# Altium PCB PLC-无线通讯版-显示板-V3.PcbDoc
Units mm, origin at the board's own origin, x right, y up, seen from the top; angles counter-clockwise.
Board outline 112 x 42 mm, 2 copper layers (Top Layer, Bottom Layer), stack 1.271 mm thick; 33 components, 29 nets, 104 pads, 87 vias.
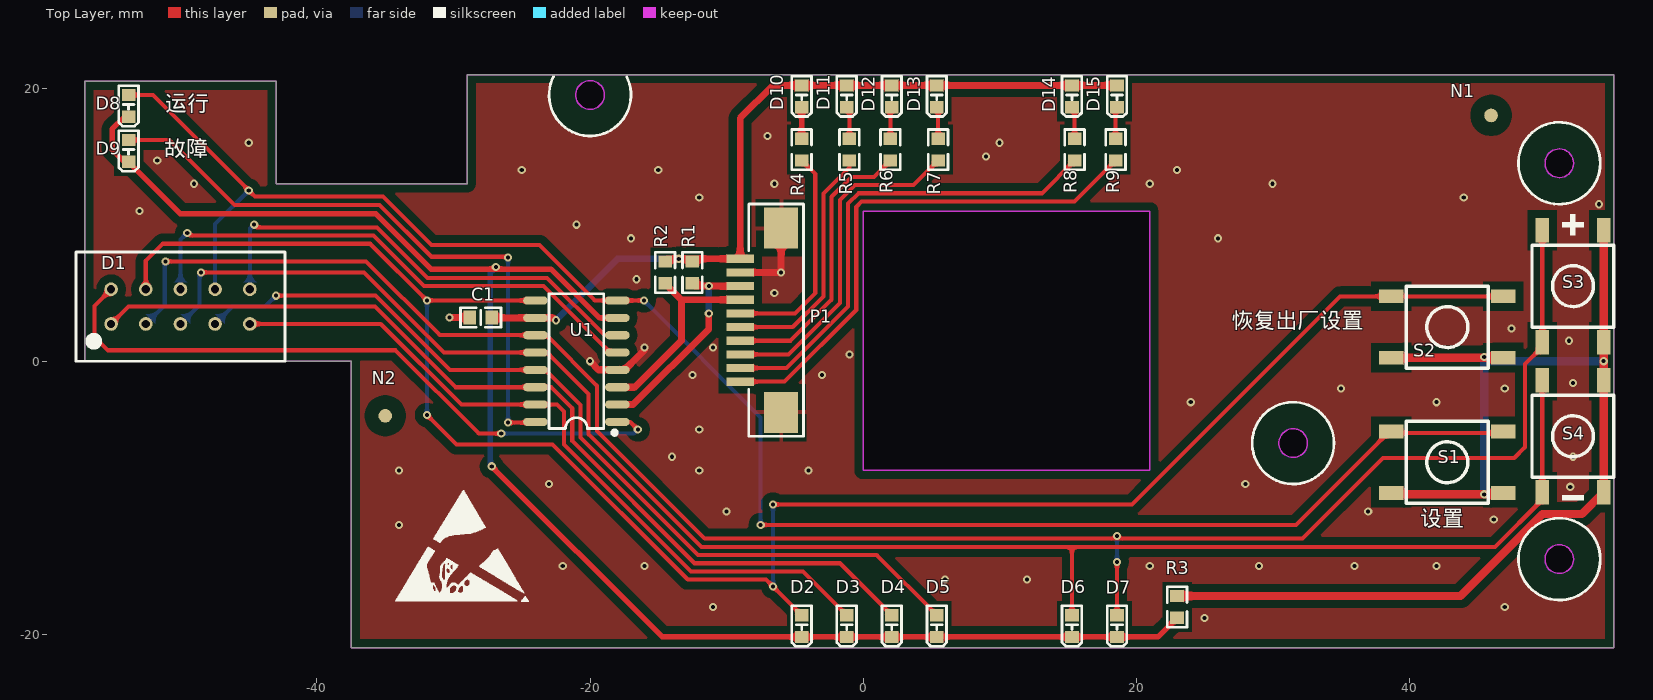
[diagram p0: Top Layer view]
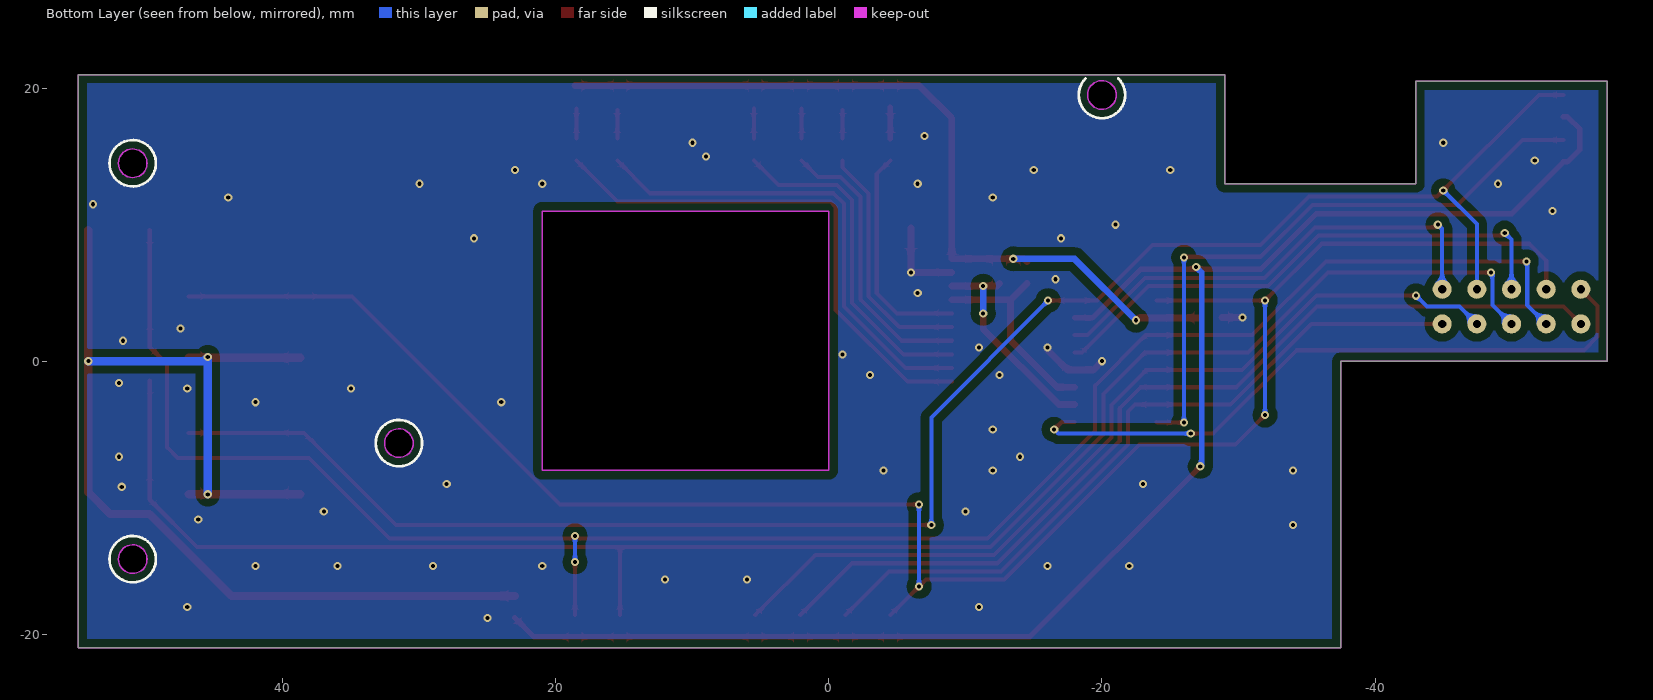
[diagram p1: Bottom Layer view, seen from below]
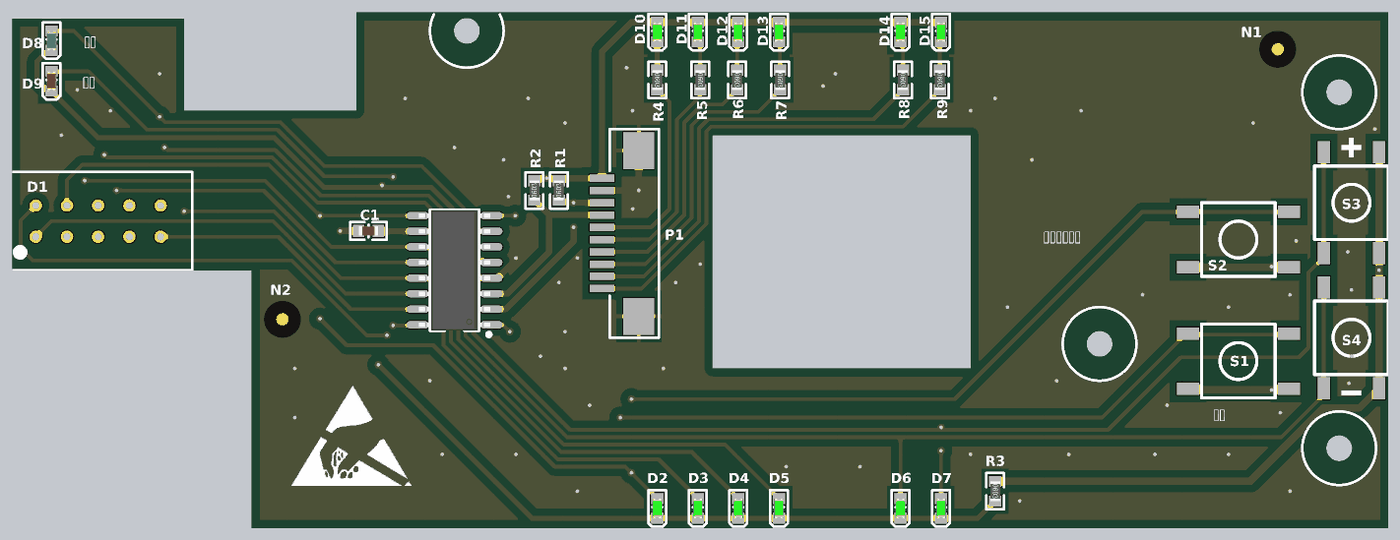
[diagram p2: 3D render of the assembled board from above, using the file's embedded part models]

## Layer stack, top to bottom
Top Solder: solder mask 0.0102, Solder Resist, Dk 3.5
Top Layer: signal copper 0.0356
Dielectric1: dielectric 1.2, FR-4, Dk 4.8
Bottom Layer: signal copper 0.0356
Bottom Solder: solder mask 0.0102, Solder Resist, Dk 3.5

## Board outline
-57,0 -57,20.5 -43,20.5 -43,13 -29,13 -29,21 55,21 55,-21 -37.5,-21 -37.5,0
cut-out: 0,-8 21,-8 21,11 0,11
cut-out: -20,20.55 ccw(c-20,19.5) -21.05,19.5 ccw(c-20,19.5) -20,18.45 ccw(c-20,19.5) -18.95,19.5 ccw(c-20,19.5)
cut-out: 51,15.55 ccw(c51,14.5) 49.95,14.5 ccw(c51,14.5) 51,13.45 ccw(c51,14.5) 52.05,14.5 ccw(c51,14.5)
cut-out: 31.5,-4.95 ccw(c31.5,-6) 30.45,-6 ccw(c31.5,-6) 31.5,-7.05 ccw(c31.5,-6) 32.55,-6 ccw(c31.5,-6)
cut-out: 51,-13.45 ccw(c51,-14.5) 49.95,-14.5 ccw(c51,-14.5) 51,-15.55 ccw(c51,-14.5) 52.05,-14.5 ccw(c51,-14.5)

## Design rules (kind name [scope] priority, off if disabled: settings)
Clearance Clearance敷铜间隔 [InPolygon] p1: gap=0.6
Clearance Clearance通用间隔 [All] p2: gap=0.3
PlaneConnect [All] p1: planeconnectstyle=Relief reliefexpansion=0.508 reliefentries=4 reliefconductorwidth=0.3 reliefairgap=0.3
PolygonConnect PolygonConnect_过孔 [All vs IsVia] p1: connectstyle=Direct reliefconductorwidth=0.254 reliefentries=4 polygonreliefangle="90 Angle" airgapwidth=0.254
PolygonConnect [All] p2: connectstyle=Relief reliefconductorwidth=0.3 reliefentries=4 polygonreliefangle="90 Angle" airgapwidth=0.6
RoutingVias [All] p1: holewidth=0.5 width=1 viastyle="Through Hole" minholewidth=0.4 minwidth=0.8 maxholewidth=10 maxwidth=10
SolderMaskExpansion [All] p1: expansion=0.102
Width [All] p1: maxlimit=10 minlimit=0.3 preferedwidth=0.5
29 further rules are at their usual default settings.

## Components (designator, comment, footprint, x,y, rotation, side; value= is the part's Value field where it differs from the comment)
C1 "105" C-0603 -28,3.2 r0 top
D1 "2351A，黄绿色，没小数点" 3位0.25英寸 -50,4 r0 top
D2 "DI1" LED-0603-GREEN -4.5,-19.4 r90 top
D3 "DI2" LED-0603-GREEN -1.2,-19.4 r90 top
D4 "DI3" LED-0603-GREEN 2.1,-19.4 r90 top
D5 "DI4" LED-0603-GREEN 5.4,-19.4 r90 top
D6 "DO1" LED-0603-GREEN 15.3,-19.4 r90 top
D7 "DO2" LED-0603-GREEN 18.6,-19.4 r90 top
D8 "运行" LED-0603-Blue -53.8,18.7 r90 top
D9 "错误" LED-0603-Red -53.8,15.4 r90 top
D10 "AI1" LED-0603-GREEN -4.5,19.4 r90 top
D11 "AI2" LED-0603-GREEN -1.2,19.4 r90 top
D12 "AI3" LED-0603-GREEN 2.1,19.4 r90 top
D13 "AI4" LED-0603-GREEN 5.4,19.4 r90 top
D14 "AO1" LED-0603-GREEN 15.3,19.4 r90 top
D15 "AO2" LED-0603-GREEN 18.6,19.4 r90 top
N1 "光学定位点" MARK-1mm-3mm 46,18 r0 top
N2 "光学定位点" MARK-1mm-3mm -35,-4 r0 top
P1 "" FPC-1.0mm下接翻盖_10P -7.5,3 r270 top
R1 "10K" R-0603 -12.5,6.5 r90 top
R2 "10K" R-0603 -14.5,6.5 r90 top
R3 "2K" R-0603 23,-18 r270 top
R4 "100" R-0603 -4.5,15.5 r270 top
R5 "100" R-0603 -1,15.5 r270 top
R6 "100" R-0603 2,15.5 r270 top
R7 "100" R-0603 5.5,15.5 r270 top
R8 "100" R-0603 15.5,15.5 r270 top
R9 "100" R-0603 18.5,15.5 r270 top
S1 "恢复出厂设置" SB-6*6*9.5_贴片 42.8,-7.4 r180 top
S2 "设置" SB-6*6*9.5_贴片 42.8,2.5 r180 top
S3 "加" SB-6*6*9.5_贴片 52,5.5 r270 top
S4 "减" SB-6*6*9.5_贴片 52,-5.5 r270 top
U1 "TM1650" SOP-16-M -21,0 r90 top

## Footprints (in the part's own frame and the unit in brackets; to place one, negate y for a bottom-side part, rotate by r counter-clockwise, add the part's x,y. Pads: shape width x height; smd on the part's side, far side on the other; paste and mask are expansions set on the pad)
3位0.25英寸 [mm]
  round 1 / inner round 1 / far side round 1.4 hole 0.6: 1(-5.08,-1.27) 2(-2.54,-1.27) 3(0,-1.27) 4(2.54,-1.27) 5(5.08,-1.27) 6(5.08,1.27) 7(2.54,1.27) 8(0,1.27) 9(-2.54,1.27) 10(-5.08,1.27)
  silkscreen extent -7.65,-4 7.65,4, body extent -7.65,-4 7.65,4, height 4
C-0603 [mm]
  rect 0.9x1 smd: 1(-0.8,0) 2(0.8,0)
  silkscreen extent -1.48,-0.72 1.48,0.72, body extent -0.8,-0.4 0.8,0.4, height 0.6
FPC-1.0mm下接翻盖_10P [mm]
  rect 0.6x2 smd: 1(-4.5,-1.5) 2(-3.5,-1.5) 3(-2.5,-1.5) 4(-1.5,-1.5) 5(-0.5,-1.5) 6(0.5,-1.5) 7(1.5,-1.5) 8(2.5,-1.5) 9(3.5,-1.5) 10(4.5,-1.5)
  rect 3x2.5 smd: 11(-6.75,1.5) 12(6.75,1.5)
  silkscreen extent -8.51,-0.86 8.49,3.13
LED-0603-Blue [mm]
  rect 0.9x1 smd: 1(0.8,0) 2(-0.8,0)
  silkscreen extent -1.48,-0.72 1.48,0.72, body extent -0.81,-0.4 0.81,0.4, height 0.6
LED-0603-GREEN [mm]
  rect 0.9x1 smd: 1(0.8,0) 2(-0.8,0)
  silkscreen extent -1.48,-0.72 1.48,0.72, body extent -0.81,-0.4 0.81,0.4, height 0.6
LED-0603-Red [mm]
  rect 0.9x1 smd: 1(0.8,0) 2(-0.8,0)
  silkscreen extent -1.48,-0.72 1.48,0.72, body extent -0.81,-0.4 0.81,0.4, height 0.6
MARK-1mm-3mm [mm]
  round 1 smd paste-0.6 mask+1: 1(0,0)
  Top Layer pour cut-out: -1.5,0 -1.386,-0.574 -1.061,-1.061 -0.574,-1.386 0,-1.5 0,-1.5 0.574,-1.386 1.061,-1.061 1.386,-0.574 1.5,0 1.5,0 1.386,0.574 1.061,1.061 0.574,1.386 0,1.5 0,1.5 -0.574,1.386 -1.061,1.061 -1.386,0.574 -1.5,0
R-0603 [mm]
  rect 0.9x1 smd: 1(-0.8,0) 2(0.8,0)
  silkscreen extent -1.48,-0.72 1.48,0.72, body extent -0.8,-0.4 0.8,0.4, height 0.45
SB-6*6*9.5_贴片 [mm]
  rect 1.8x1 smd: 1(-4.1,2.25) 1(4.1,2.25) 2(-4.1,-2.25) 2(4.1,-2.25)
  silkscreen extent -3,-3 3,3, body extent -3,-3 3,3, height 9.5
SOP-16-M [mm]
  oval 0.6x1.8 smd: 1(-4.445,-3) 2(-3.175,-3) 3(-1.905,-3) 4(-0.635,-3) 5(0.635,-3) 6(1.905,-3) 7(3.175,-3) 8(4.445,-3) 9(4.445,3) 10(3.175,3) 11(1.905,3) 12(0.635,3) 13(-0.635,3) 14(-1.905,3) 15(-3.175,3) 16(-4.445,3)
  silkscreen extent -5.38,-2.95 4.93,2, body extent -4.9,-2.9 4.9,2.9, height 1.75

## Part data
C1: library part Cap, "Capacitor"
D1: library part 3位数码管-无点-2351A
D2 D3 D4 D5 D6 D7 D8 D9 D10 D11 D12 D13 D14 D15: library part LED-0603-Blue
N1 N2: library part 无引脚
P1: library part "Header 12", "Header, 12-Pin"
R1 R2 R3 R4 R5 R6 R7 R8 R9: library part Res2-0603, "0603"
S1 S2 S3 S4: library part SB-6*6*9, "SB-6*6*10"
U1: "共阴数码管驱动器"

## Via types
v1: diameter 0.6, hole 0.3, Top Layer to Bottom Layer, tented both sides, 87 vias

## Nets (pads, with @x,y where several pads share a name; then routed paths per layer and width w, separated by ;. In a path a pad name is that pad's centre, name@x,y a point inside that pad or via, vN(x,y) a via of type N, cw(c..) or ccw(c..) an arc to the next point about the centre after c; other vN are vias at no path point)
3.3V: C1.2 D10.1 D11.1 D12.1 D13.1 D14.1 D15.1 P1.1 R1.2 R2.2 U1.10 | length 60.1
  Top Layer w0.5: C1.2@-27.175,3.175 U1.10 -22.675,3.175 v1(-22.5,3) ; R2.2 -14.3,7.5 P1.1 -9,17.8 -6.6,20.2 D10.1 D11.1 D12.1 D13.1 D14.1 D15.1
  Bottom Layer w0.5: v1(-22.5,3) -18,7.5 v1(-13.5,7.5)
A: D1.7 D8.1 S1.2 U1.8 | length 129.4
  Top Layer w0.3: D8.1 -52,19.5 -44.55,12.05 -35.166,12.05 -31.616,8.5 -23.707,8.5 -19.652,4.445 U1.8 v1(-16.055,4.445) ; v1(-7.5,-12) 31.7,-12 38.45,-5.25 S1.2@46.9,-5.25
  Bottom Layer w0.3: D1.7 -47.46,10.04 v1(-45,12.5) ; v1(-16.055,4.445) -7.5,-4.11 v1(-7.5,-12)
B: D1.9 D2.1 S2.2 U1.9 | length 140.6
  Top Layer w0.3: D1.9 -52.54,7.36 -51.3,8.6 -36.1,8.6 v1(-31.945,4.445) U1.9 ; v1(-31.945,-3.945) -29.79,-6.1 -22.743,-6.1 -12.843,-16 -7.1,-16 D2.1 ; v1(-6.6,-10.5) 19.7,-10.5 34.95,4.75 38.7,4.75 S2.2@46.9,4.75
  Bottom Layer w0.3: D1.9 D1.9@-52.5,5.27 ; v1(-31.945,-3.945) v1(-31.945,4.445) ; v1(-6.6,-16.5) v1(-6.6,-10.5)
C: D1.2 D7.1 S3.2 U1.11 | length 140.1
  Top Layer w0.3: v1(-51.1,7.3) -36.4,7.3 -31.005,1.905 U1.11 -23.205,1.905 -19.5,-1.8 -19.5,-5.1 -11.6,-13 32.2,-13 38.1,-7.1 47.7,-7.1 48.5,-6.3 48.5,-0.2 49.75,1.05 49.75,1.4 S3.2@49.75,9.6 ; D7.1 v1(18.6,-14.7)
  Bottom Layer w0.3: D1.2 -51.15,4.12 -51.15,7.25 v1(-51.1,7.3) ; v1(18.6,-14.7) v1(18.6,-12.8)
D: D1.3 D6.1 S4.2 U1.12 | length 127.9
  Top Layer w0.3: v1(-48.5,6.5) -36.554,6.5 -30.689,0.635 U1.12 -23.135,0.635 -20.1,-2.4 -20.1,-5.349 -11.849,-13.6 46.3,-13.6 49.75,-10.15 49.75,-9.6 S4.2@49.75,-1.4 ; D6.1 15.3,-13.6
  Bottom Layer w0.3: D1.3 -48.61,4.12 -48.61,6.39 v1(-48.5,6.5)
DIG1: D1.10 U1.1 | length 48.6
  Top Layer w0.3: D1.10 -56.3,4.05 -56.3,1.8 -55.3,0.8 -34.249,0.8 -28.149,-5.3 v1(-26.5,-5.3) ; U1.1 -17.055,-4.445 v1(-16.5,-5)
  Bottom Layer w0.3: v1(-26.5,-5.3) -16.8,-5.3 v1(-16.5,-5)
DIG2: D1.8 U1.5 | length 39.5
  Top Layer w0.3: v1(-49.5,9.4) -49.3,9.2 -35.851,9.2 -32.151,5.5 -23.394,5.5 -18.529,0.635 U1.5
  Bottom Layer w0.3: D1.8 -50,8.9 v1(-49.5,9.4)
DIG3: D1.6 U1.6 | length 34.8
  Top Layer w0.3: v1(-44.6,10) -44.4,9.8 -35.603,9.8 -31.903,6.1 -23.146,6.1 -18.951,1.905 U1.6
  Bottom Layer w0.3: D1.6 -44.92,9.68 v1(-44.6,10)
DIG4: D2.2 D3.2 D4.2 D5.2 D6.2 D7.2 D8.2 D9.2 R3.2 U1.7 | length 115.9
  Top Layer w0.4: D8.2 -54.1,17.9 -55,17 -55,15.5 -54.1,14.6 D9.2 -50,10.8 -35.684,10.8 -31.634,6.75 -22.877,6.75 -19.302,3.175 U1.7 ; v1(-27.2,-7.7) -14.7,-20.2 D2.2 D3.2 D4.2 D5.2 D6.2 D7.2 21.6,-20.2 R3.2
  Bottom Layer w0.4: v1(-27.2,-7.7) -27.3,-7.6 -27.3,6.5 v1(-26.9,6.9)
DP: D9.1 U1.16 | length 45.5
  Top Layer w0.3: D9.1 -50.8,16.2 -46.05,11.45 -35.414,11.45 -31.614,7.65 -26.05,7.65 v1(-26,7.6) ; v1(-26,-4.5) -24.055,-4.5 U1.16
  Bottom Layer w0.3: v1(-26,-4.5) v1(-26,7.6)
E: D1.4 D5.1 U1.13 | length 64.8
  Top Layer w0.3: v1(-43,4.8) -35.703,4.8 -30.268,-0.635 U1.13 -23.265,-0.635 -20.7,-3.2 -20.7,-5.597 -12.097,-14.2 1,-14.2 D5.1
  Bottom Layer w0.3: D1.4 -46.19,4 -43.8,4 v1(-43,4.8)
F: D1.1 D4.1 U1.14 | length 68.5
  Top Layer w0.3: D1.1 -53.81,4 -35.751,4 -29.846,-1.905 U1.14 -22.844,-1.905 -21.3,-3.449 -21.3,-5.846 -12.346,-14.8 -1.7,-14.8 D4.1
G: D1.5 D3.1 U1.15 | length 54
  Top Layer w0.3: D1.5 -35.33,2.73 -29.425,-3.175 U1.15 -22.422,-3.175 -21.9,-3.697 -21.9,-6.094 -12.594,-15.4 -4.4,-15.4 D3.1
GND: C1.1 P1.2 P1.11 P1.12 U1.4 | length 12.7
  Top Layer w0.5: v1(-30.3,3.2) C1.1 ; v1(-20,0) -19.365,-0.635 U1.4 -17.468,-0.635 -16,0.833 v1(-16,1) ; P1.2 -6.2,6.5 -6,6.7 P1.11
  other v1: 25,-18.8 -11,-18 47,-18 6,-16 12,-16 -22,-15 -16,-15 21,-15 29,-15 36,-15 42,-15 -34,-12 46.2,-11.6 -10,-11 37,-11 51.8,-9.2 -23,-9 28,-9 -34,-8 -12,-8 -4,-8 -14,-7 52,-7 -12,-5 24,-3 42,-3 35,-2 47,-2 52,-1.6 -12.5,-1 -3,-1 -1,0.5 -11,1 51.7,1.5 47.5,2.4 -6.5,5 -16.6,6 -6,6.5 -17,9 26,9 -21,10 -53,11 53.9,11.5 -12,12 44,12 -49,13 -6.5,13 21,13 30,13 -25,14 -15,14 23,14 -51.7,14.7 9,15 -45,16 10,16 -7,16.5
LED-AI1: P1.5 R4.2 | length 16.2
  Top Layer w0.3: P1.5 -5,3.5 -3.5,5 -3.5,13.7 R4.2
LED-AI2: P1.6 R5.2 | length 17.8
  Top Layer w0.3: P1.6 -5.151,2.5 -2.9,4.751 -2.9,12.294 -1,14.194 R5.2
LED-AI3: P1.7 R6.2 | length 20.9
  Top Layer w0.3: P1.7 -5.303,1.5 -2.3,4.503 -2.3,12.046 -0.846,13.5 0.8,13.5 R6.2
LED-AI4: P1.8 R7.2 | length 24.8
  Top Layer w0.3: P1.8 -5.454,0.5 -1.7,4.254 -1.7,11.797 -0.597,12.9 3.7,12.9 R7.2
LED-AO1: P1.9 R8.2 | length 35.2
  Top Layer w0.3: P1.9 -5.606,-0.5 -1.1,4.006 -1.1,11.549 -0.349,12.3 13.1,12.3 R8.2
LED-AO2: P1.10 R9.2 | length 38.6
  Top Layer w0.3: P1.10 -5.757,-1.5 -0.5,3.757 -0.5,11.3 -0.1,11.7 15.5,11.7 R9.2
NetD10_2: D10.2 R4.1 | length 2.3
  Top Layer w0.4: R4.1 D10.2
NetD11_2: D11.2 R5.1 | length 2.1
  Top Layer w0.3: R5.1 D11.2@-1,18.4
NetD12_2: D12.2 R6.1 | length 2.2
  Top Layer w0.3: R6.1 D12.2@2,18.5
NetD13_2: D13.2 R7.1 | length 2.2
  Top Layer w0.3: R7.1 D13.2@5.5,18.5
NetD14_2: D14.2 R8.1 | length 2.1
  Top Layer w0.3: R8.1 D14.2@15.5,18.4
NetD15_2: D15.2 R9.1 | length 2.2
  Top Layer w0.3: R9.1 D15.2@18.5,18.5
NetR3_1: R3.1 S1.1 S2.1 S3.1 S4.1 | length 88.9
  Top Layer w0.6: R3.1 43.761,-17.2 49.761,-11.2 52.65,-11.2 54.25,-9.6 54.25,-1.4 v1(54.25,0) 54.25,1.4 S3.1@54.25,9.6 ; S1.1@38.7,-9.75 v1(45.5,-9.75) S1.1@46.9,-9.75 ; S2.1@38.7,0.25 S2.1@46.9,0.25
  Bottom Layer w0.6: v1(45.5,-9.75) v1(45.5,0.3) 45.8,0 v1(54.25,0)
SCL: P1.3 R1.1 U1.2 | length 15.7
  Top Layer w0.5: U1.2 -16.844,-3.175 -11.3,2.369 v1(-11.3,3.5) ; R1.1 -12.3,5.5 P1.3
  Bottom Layer w0.5: v1(-11.3,3.5) v1(-11.3,5.5)
SDA: P1.4 R2.1 U1.3 | length 15.1
  Top Layer w0.5: U1.3 -16.705,-1.905 -13.3,1.5 -13.3,4.5 ; R2.1 -13.3,4.5 ; P1.4 -13.3,4.5
pads on no net: N1.1 N2.1

## Polygon pours and split planes (outlines as drawn)
GND on Top Layer "Bottom Layer-No Net" (solid, remove dead copper, pour order 8): -57,20.5 -43,20.5 -43,13 -29,13 -29,21 55,21 55,-21 -37.5,-21 -37.5,0 -57,0
GND on Bottom Layer "Bottom Layer-No Net" (solid, remove dead copper, pour order 10): -57,20.5 -43,20.5 -43,13 -29,13 -29,21 55,21 55,-21 -37.5,-21 -37.5,0 -57,0

## Keep-outs
Keep-Out Layer:
  circle w0.1: c-20,19.5 r1.05
  circle w0.1: c51,14.5 r1.05
  circle w0.1: c31.5,-6 r1.05
  circle w0.1: c51,-14.5 r1.05
  lines w0.1: -57,0 -57,20.5 -43,20.5 -43,13 -29,13 -29,21 55,21 55,-21 -37.5,-21 -37.5,0 -57,0 ; 0,-8 21,-8 21,11 0,11 0,-8

## Other copper
Top Layer:
  pour cut-out: -23,19.5 ccw(c-20,19.5) -20,16.5 ccw(c-20,19.5) -17,19.5 ccw(c-20,19.5) -20,22.5 ccw(c-20,19.5)
  pour cut-out: -21.7,19.5 ccw(c-20,19.5) -20,17.8 ccw(c-20,19.5) -18.3,19.5 ccw(c-20,19.5) -20,21.2 ccw(c-20,19.5)
  pour cut-out: 48,14.5 ccw(c51,14.5) 51,11.5 ccw(c51,14.5) 54,14.5 ccw(c51,14.5) 51,17.5 ccw(c51,14.5)
  pour cut-out: 49.3,14.5 ccw(c51,14.5) 51,12.8 ccw(c51,14.5) 52.7,14.5 ccw(c51,14.5) 51,16.2 ccw(c51,14.5)
  pour cut-out: 28.5,-6 ccw(c31.5,-6) 31.5,-9 ccw(c31.5,-6) 34.5,-6 ccw(c31.5,-6) 31.5,-3 ccw(c31.5,-6)
  pour cut-out: 29.8,-6 ccw(c31.5,-6) 31.5,-7.7 ccw(c31.5,-6) 33.2,-6 ccw(c31.5,-6) 31.5,-4.3 ccw(c31.5,-6)
  pour cut-out: 49.3,-14.5 ccw(c51,-14.5) 51,-16.2 ccw(c51,-14.5) 52.7,-14.5 ccw(c51,-14.5) 51,-12.8 ccw(c51,-14.5)
  pour cut-out: 48,-14.5 ccw(c51,-14.5) 51,-17.5 ccw(c51,-14.5) 54,-14.5 ccw(c51,-14.5) 51,-11.5 ccw(c51,-14.5)

## Silkscreen, mask and mechanical layers (free items; w line width, h text height)
Top Overlay:
  drawing of 781 lines, arcs and shapes, not listed
  text "运行" at -51.1,17.9 h2
  text "故障" at -51.2,14.6 h2
  text "恢复出厂设置" at 27,2 h2
  text "设置" at 40.8,-12.5 h2
Bottom Overlay:
  circle w0.2: c51,14.5 r1.7
  circle w0.2: c31.5,-6 r1.7
  circle w0.2: c51,-14.5 r1.7
  lines w0.2: -21.202,20.702 ccw(c-20,19.5) -18.798,20.702
Mechanical 9:
  lines w0.1: -39,-19.4 37.5,-19.4 ; -39,19.4 37.5,19.4 ; -33.5,-21.5 -33.5,-18 ; -33.5,18 -33.5,21.5 ; -30.2,-21.5 -30.2,-18 ; -30.2,18 -30.2,21.5 ; -26.9,-21.5 -26.9,-18 ; -26.9,18 -26.9,21.5 ; -23.6,-21.5 -23.6,-18 ; -20.3,-21.5 -20.3,-18 ; -17,-21.5 -17,-18 ; -13.7,-21.5 -13.7,-18 ; -10.4,-21.5 -10.4,-18 ; -10.4,18 -10.4,21.5 ; -5,-20.4 -5,-17.4 ; -4.5,17.4 -4.5,20.4 ; -1.7,-21.5 -1.7,-18 ; -1.7,18 -1.7,21.5 ; 1.6,-21.5 1.6,-18 ; 1.6,18 1.6,21.5 ; 4.9,-21.5 4.9,-18 ; 4.9,18 4.9,21.5 ; 8.2,-21.5 8.2,-18 ; 8.2,18 8.2,21.5 ; 11.5,-21.5 11.5,-18 ; 11.5,18 11.5,21.5 ; 14.8,-21.5 14.8,-18 ; 14.8,18 14.8,21.5 ; 18.1,-21.5 18.1,-18 ; 18.1,18 18.1,21.5
Mechanical 14:
  lines w0.1: -60,0 60,0 ; -53.8,10 -53.8,42.3 ; -39,-26.5 57.5,-26.5 ; -39,26.5 57.5,26.5 ; 0,-40 0,40 ; -58.5,-0.5 -41.5,-0.5 ; -58.5,-0.5 -58.5,8.4 ; -58.5,-0.5 -41.5,8.4 ; -58.5,8.4 -41.5,8.4 ; -58.5,8.4 -41.5,-0.5 ; -41.5,-0.5 -41.5,8.4
Mechanical 15:
  lines w0.1: -73.5,-24 69,-24 ; -60,-0.5 -39,-0.5 -39,-40 ; -54.7,22 -52.3,22 ; -53.8,15.4 -52.4,15.4 ; -53.8,18.7 -52.3,18.7 ; -50.5,-31.5 -50.5,31.5 ; -41.2,40 -41.2,24 -39,24 -39,40 ; -14.2,-41.4 -14.2,-28.4 ; -11,3 53.5,3 ; 32.7,-41.4 32.7,-28.4 ; 39,-7.5 46,-7.5 ; 42.8,-13 42.8,18 ; 50.5,-31.5 50.5,31.5 ; -60,-40 -60,40 59.5,40 59.5,-40 -60,-40 ; -54.6,14.6 -54.6,16.2 -53,16.2 -53,14.6 -54.6,14.6 ; -54.6,17.9 -54.6,19.5 -53,19.5 -53,17.9 -54.6,17.9 ; -54.6,21.2 -54.6,22.8 -53,22.8 -53,21.2 -54.6,21.2 ; 47.2,-11 56.65,-11 56.65,11 47.2,11 47.2,-11
  lines w0.2: -43.5,-117.5 44.5,-117.5 ; -43.5,-111.5 44.5,-111.5 ; -43.5,-105.5 44.5,-105.5 ; -43.5,-99.5 44.5,-99.5 ; -43.5,-93.5 44.5,-93.5 ; -43.5,-87.5 44.5,-87.5 ; -43.5,-81.5 44.5,-81.5 ; -21.5,-123.5 -21.5,-75.5 -21.5,-69.5 ; -43.5,-75.5 -43.5,-123.5 44.5,-123.5 44.5,-75.5 ; -43.5,-75.5 44.5,-75.5 ; -43.5,-75.5 -43.5,-69.5 44.5,-69.5 44.5,-75.5
  text "邵宁鹏20180202" at 51.6,-19.2 h0.1
  text "公司" at -42.5,-74.5 h5
  text "杭州久天科技有限公司" at -18.5,-74.5 h5
  text "工程" at -42.5,-80.5 h5
  text "设计" at -42.5,-86.5 h5
  text "邵宁鹏" at -18.5,-86.5 h5
  text "日期" at -42.5,-92.5 h5
  text "板厚" at -42.5,-98.5 h5
  text "1.6mm" at -18.5,-98.5 h5
  text "阻焊油" at -42.5,-104.5 h5
  text "绿色" at -18.5,-104.5 h5
  text "丝印" at -42.5,-110.5 h5
  text "白色" at -18.5,-110.5 h5
  text "板材" at -42.5,-116.5 h5
  text "FR-4" at -18.5,-116.5 h5
  text "其他" at -42.5,-122.5 h5
  text "有铅喷锡，过孔盖油" at -18.5,-122.5 h5

## Dimensions
-57,20.5 to 55,-21 on Mechanical 15
56,-21 to 56,21 on Mechanical 15